# EAGLE board Incubadora_huevos (EAGLE 7.6.0)
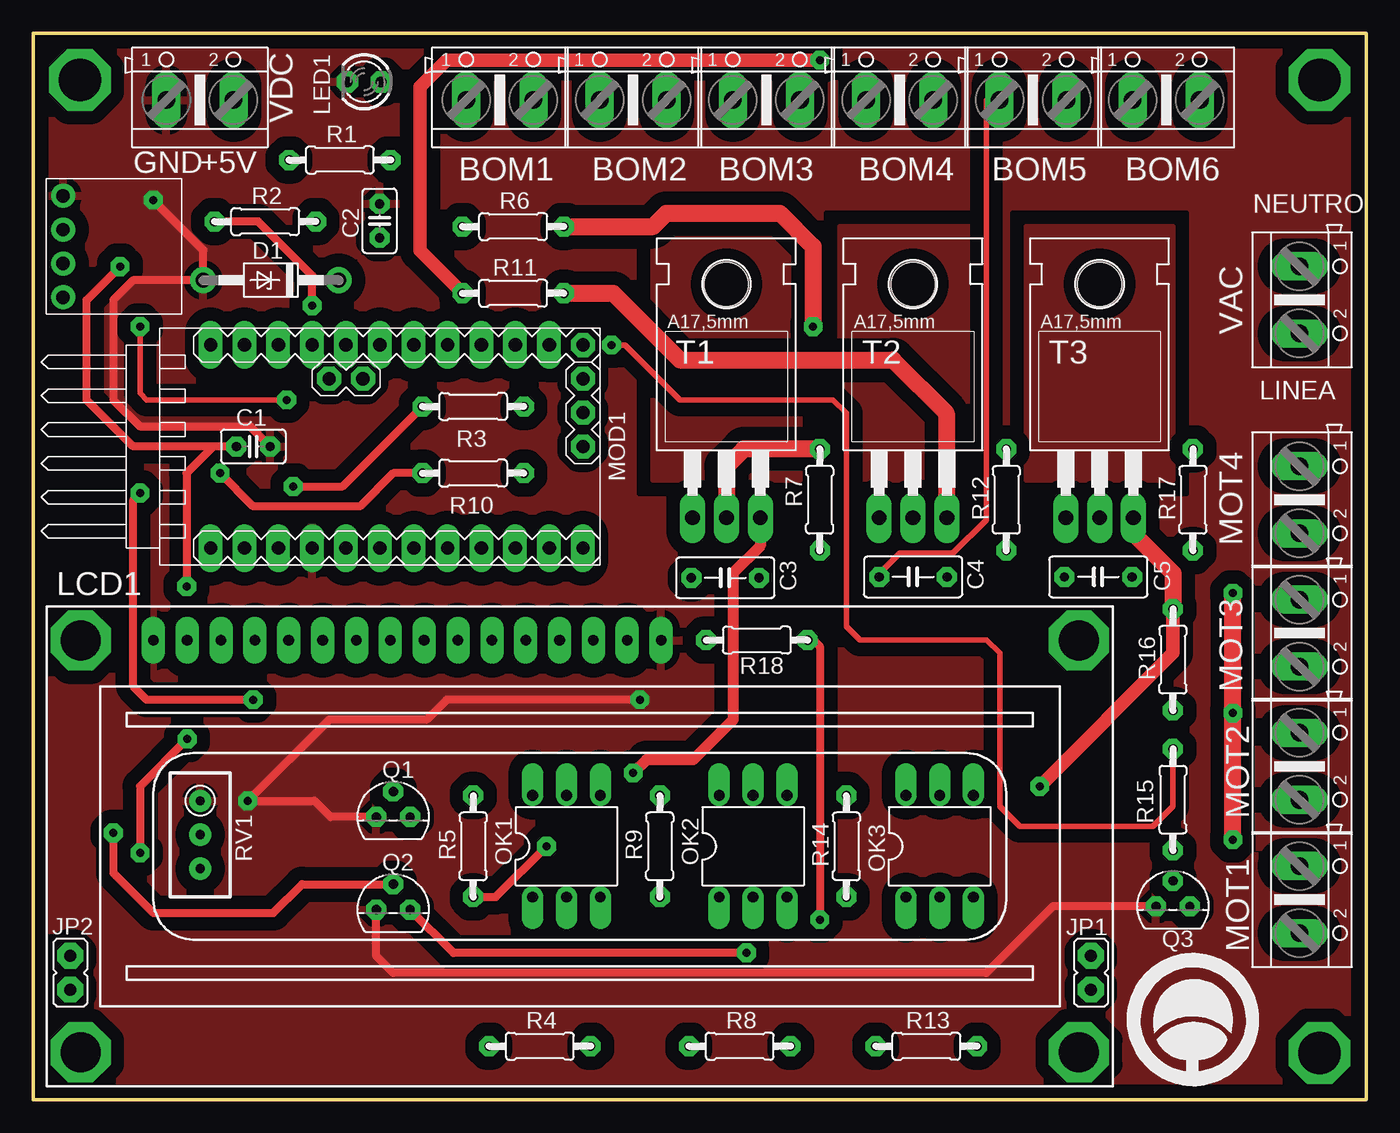
[diagram p0: board, top side]
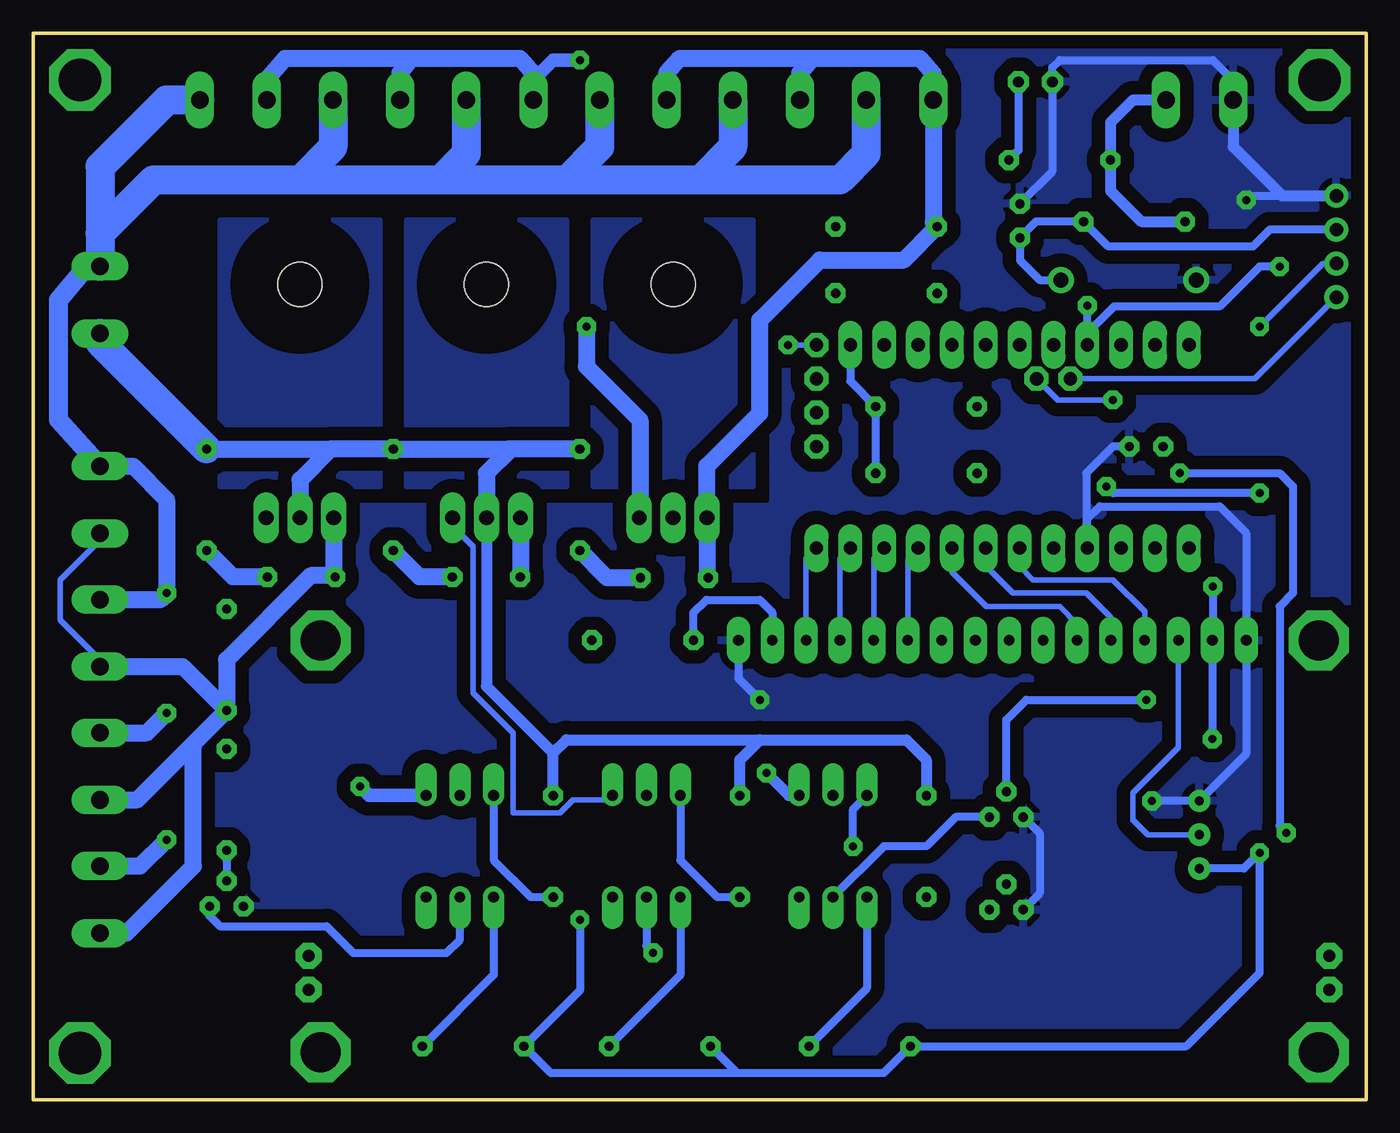
[diagram p1: board, bottom side, seen from below]

Size 100 x 80 mm. Coordinates in mm from the lower left corner, seen from the top.
Outline: 0,0 100,0 100,80 0,80 0,0
Copper layers (1*16): Top 0.035mm / dielectric 1.5mm / Bottom 0.035mm
Design rules "Circuitos_Creativos_2_capas": minimum track width 0.4mm, minimum drill 0.6mm, track to track 10mil, track to pad 10mil, pad to pad 10mil, via to via 10mil, smd to smd 8mil, copper to edge 1mm, drill to drill 15mil, minimum pad ring 0.4mm, minimum via ring 0.4mm, stop-mask expansion 4mil, vias tented up to drill 0mil, thermal gap 20mil
Net classes: 1 PWR: width 0.305 mm, clearance 0.254 mm

## Footprints (pad centres in the part's own frame; a part is rotated, then mirrored left to right if it is on the bottom)
AK500/2 = drill 1.321 long: 1 -2.515,0; 2 2.515,0
C025-025X050 = drill 0.7 pad 1.422 octagon: 1 -1.27,0; 2 1.27,0
C050-030X075 = drill 0.7 pad 1.422 octagon: 1 -2.54,0; 2 2.54,0
DO41Z10 = drill 1.1 pad 1.93: A 5.08,0; C -5.08,0
JP1 = drill 0.9 pad 1.93 octagon: 1 0,-1.27; 2 0,1.27
LCD1602 = drill 0.8 pad 1.778 long: 1 8,33.46; 2 10.54,33.46; 3 13.08,33.46; 4 15.62,33.46; 5 18.16,33.46; 6 20.7,33.46; 7 23.24,33.46; 8 25.78,33.46; 9 28.32,33.46; 10 30.86,33.46; 11 33.4,33.46; 12 35.94,33.46; 13 38.48,33.46; 14 41.02,33.46; 15 43.56,33.46; 16 46.1,33.46 | drill 3 octagon: P1 2.54,33.46; P2 2.54,2.54; P3 77.46,2.54; P4 77.46,33.46
LED3MM = drill 0.8 pad 1.6 octagon: A -1.27,0; K 1.27,0
ARDUINO-PRO-MINI#APC = drill 1 pad 1.676 octagon: J2.1 -1.27,5.08; J2.2 -3.81,5.08 | drill 1 pad 1.778 octagon: J3.1 15.24,0; J3.2 15.24,2.54; J3.3 15.24,5.08; J6.12 15.24,7.62 | drill 1 long: J6.1 -12.7,7.62; J6.2 -10.16,7.62; J6.3 -7.62,7.62; J6.4 -5.08,7.62; J6.5 -2.54,7.62; J6.6 0,7.62; J6.7 2.54,7.62; J6.8 5.08,7.62; J6.9 7.62,7.62; J6.10 10.16,7.62; J6.11 12.7,7.62; J7.1 15.24,-7.62; J7.2 12.7,-7.62; J7.3 10.16,-7.62; J7.4 7.62,-7.62; J7.5 5.08,-7.62; J7.6 2.54,-7.62; J7.7 0,-7.62; J7.8 -2.54,-7.62; J7.9 -5.08,-7.62; J7.10 -7.62,-7.62; J7.11 -10.16,-7.62; J7.12 -12.7,-7.62
DIL06 = drill 0.813 offset: 1 -2.54,-3.81; 2 0,-3.81; 3 2.54,-3.81; 4 2.54,3.81; 5 0,3.81; 6 -2.54,3.81
TO92D = drill 0.7 pad 1.422 octagon: B 0,1.905; C 1.27,0; E -1.27,0
0204/7 = drill 0.7 pad 1.422 octagon: 1 -3.81,0; 2 3.81,0
RTRIM3296W = drill 0.7 pad 1.676: 1 0,-2.54; 2 0,0; 3 0,2.54
TO220BH = drill 1.118 long: G 2.54,-6.35; T1 -2.54,-6.35; T2 0,-6.35 | hole 3.302: 0,11.176
SHT20 = drill 1 pad 1.778: GND -3.81,-1.27; SCL 3.81,-1.27; SDA 1.27,-1.27; VCC -1.27,-1.27

## Placement (x,y rotation side)
BOM1  [AK500/2]  35,75 0 top
BOM2  [AK500/2]  45,75 0 top
BOM3  [AK500/2]  55,75 0 top
BOM4  [AK500/2]  65,75 0 top
BOM5  [AK500/2]  75,75 0 top
BOM6  [AK500/2]  85,75 0 top
C1  100n  [C025-025X050]  16.5,49 0 top
C2  100n  [C025-025X050]  25.98,65.93 90 top
C3  10n  [C050-030X075]  51.91,39.14 180 top
C4  10n  [C050-030X075]  66.01,39.21 180 top
C5  10n  [C050-030X075]  79.9,39.21 180 top
D1  3.3V  [DO41Z10]  17.83,61.48 180 top
JP1  [JP1]  79.35,9.52 0 top
JP2  [JP1]  2.77,9.52 0 top
LCD1  HD44780LCD-1602  [LCD1602]  1,1 0 top
LED1  ROJO  [LED3MM]  24.82,76.36 180 top
MOD1  ARDUINO-PRO-MINI-3.3V#APC  [ARDUINO-PRO-MINI#APC]  26,49 0 top
MOT1  [AK500/2]  95,15 270 top
MOT2  [AK500/2]  95,25 270 top
MOT3  [AK500/2]  95,35 270 top
MOT4  [AK500/2]  95,45 270 top
OK1  MOC3021M  [DIL06]  40,19 0 top
OK2  MOC3021M  [DIL06]  54,19 0 top
OK3  MOC3021M  [DIL06]  68,19 0 top
Q1  2N3904  [TO92D]  27,21.2 0 top
Q2  2N3904  [TO92D]  27,14.25 0 top
Q3  2N3904  [TO92D]  85.5,14.5 0 top
R1  1k  [0204/7]  23,70.5 0 top
R2  100R  [0204/7]  17.4,65.87 0 top
R3  5k1  [0204/7]  33,52 180 top
R4  220R  [0204/7]  38,4 0 top
R5  330R  [0204/7]  33,19 90 top
R6  330R  [0204/7]  36,65.5 0 top
R7  39R  [0204/7]  59,45 90 top
R8  220R  [0204/7]  53,4 0 top
R9  330R  [0204/7]  47,19 90 top
R10  5k1  [0204/7]  33,47 180 top
R11  330R  [0204/7]  36,60.5 0 top
R12  39R  [0204/7]  73,45 90 top
R13  220R  [0204/7]  67,4 0 top
R14  330R  [0204/7]  61,19 90 top
R15  5k1  [0204/7]  85.5,22.5 270 top
R16  330R  [0204/7]  85.5,33 90 top
R17  39R  [0204/7]  87,45 90 top
R18  100R  [0204/7]  54.28,34.47 180 top
RV1  5k  [RTRIM3296W]  12.52,19.87 180 top
T1  BT138-H  [TO220BH]  52,50 0 top
T2  BT138-H  [TO220BH]  66,50 0 top
T3  BT138-H  [TO220BH]  80,50 0 top
U1  SHT20  [SHT20]  3.5,64 270 top
U$1  A4_HORIZONTAL  [LOGO]  87,6 0 top
VAC  [AK500/2]  95,60 270 top
VDC  [AK500/2]  12.5,75 0 top

## Library data of the parts
BOM1-BOM6 MOT1-MOT4 VAC VDC = con-ptr500; OC_FARNELL: unknown; OC_NEWARK: unknown
C1-C5 R1-R18 RV1 = rcl
D1 = diode
JP1 JP2 = jumper
LCD1 = adafruit
LED1 = led
MOD1 = DIY- comercial modules
OK1-OK3 = optocoupler; MF: FAIRCHILD SEMICONDUCTOR; MPN: MOC3021-M; OC_FARNELL: 1021365; OC_NEWARK: 95B7895
Q1-Q3 = transistor-small-signal
T1-T3 = triac
U1 = Circuitos-Creativos-Sensores
U$1 = Circuitos-Creativos-Estilos

## Nets
+3V3: C2.1 D1.C R2.2 U1.VCC
+5V: C1.1 LCD1.2 MOD1.J6.4 R1.1 R2.1 R4.1 R8.1 R13.1 R18.1 RV1.3 VDC.2
BOM: MOD1.J6.11 R3.1 R10.1
D4: LCD1.11 MOD1.J7.4
D5: LCD1.12 MOD1.J7.3
D6: LCD1.13 MOD1.J7.2
D7: LCD1.14 MOD1.J7.1
E: LCD1.6 MOD1.J7.5
GND: C1.2 C2.2 D1.A LCD1.1 LCD1.16 LED1.K MOD1.J7.9 Q1.E Q2.E Q3.E RV1.1 U1.GND VDC.1
GND.2: MOD1.J6.2
INT: MOD1.J7.8
LINEA: R5.2 R7.2 R9.2 R12.2 R14.2 R17.2 T1.T2 T2.T2 T3.T2 VAC.2
LOAD1: BOM1.1 BOM2.1 BOM3.1 C3.2 R6.1 T1.T1
LOAD2: BOM4.1 BOM5.1 BOM6.1 C4.2 R11.1 T2.T1
LOAD3: C5.2 MOT1.2 MOT2.2 MOT3.2 MOT4.2 R16.1 T3.T1
MOT: MOD1.J6.12 R15.1
N$1: LED1.A R1.2
N$2: OK1.4 R6.2 T1.G
N$3: OK1.1 R4.2
N$4: OK1.6 R5.1
N$5: Q1.B R3.2
N$6: OK1.2 Q1.C
N$7: OK2.4 R11.2 T2.G
N$8: OK2.1 R8.2
N$9: C3.1 R7.1
N$10: OK2.6 R9.1
N$11: Q2.B R10.2
N$12: OK2.2 Q2.C
N$13: C4.1 R12.1
N$14: OK3.4 R16.2 T3.G
N$15: OK3.1 R13.2
N$16: OK3.6 R14.1
N$17: Q3.B R15.2
N$18: OK3.2 Q3.C
N$19: C5.1 R17.1
N$34: LCD1.3 RV1.2
N$46: LCD1.15 R18.2
NEUTR: BOM1.2 BOM2.2 BOM3.2 BOM4.2 BOM5.2 BOM6.2 MOT1.1 MOT2.1 MOT3.1 MOT4.1 VAC.1
RAW: MOD1.J6.1
RS: LCD1.4 MOD1.J7.7
RW: LCD1.5 MOD1.J7.6
SCL: MOD1.J2.2 U1.SCL
SDA: MOD1.J2.1 U1.SDA

## Tracks (layer width: path | path; a pad name or v marks a point on that pad's centre or on a via)
+3V3
  Bottom 0.61: U1.VCC 7.23,65.27 8.5,64 19.34,64 R2.2 24.77,65.87 C2.1 25.98,62.98 24.5,61.5 22.93,61.5 D1.C
+5V  (via drill 0.6 pad 1.02, 0.6 pad 1.42)
  Top 0.61: v11.54,27.04 8,23.5 v8,18.5 | v11.5,38.5 11.5,47 13.5,49 C1.1 7.5,49 4,52.5 4,60 v6.5,62.5 | v20.92,59.58 20.92,61.82 16.87,65.87 R2.1 | R18.1 58.53,34.47 59,34 v59,13.5
  Bottom 0.61: v11.54,27.04 LCD1.2 11.5,34.5 v11.5,38.5 | RV1.3 9.17,17.33 v8,18.5 8,9.5 13.5,4 R4.1 36.19,2 47.19,2 | R8.1 47.19,2 | 47.19,2 61.19,2 R13.1 59,8.19 v59,13.5 | MOD1.J6.4 20.92,57.5 | 20.92,57.5 v20.92,59.58 | v6.5,62.5 8,62.5 11,59.5 18.92,59.5 20.92,57.5
  Bottom 0.813: VDC.2 17.5,75 19.19,73.31 R1.1 19.19,68.19 16.87,65.87 R2.1
BOM
  Bottom 0.61: MOD1.J6.11 38.7,53.89 R3.1 R10.1
D4
  Bottom 0.406: MOD1.J7.4 34.4,40.6 LCD1.11
D5
  Bottom 0.406: MOD1.J7.3 36.94,40.6 LCD1.12
D6
  Bottom 0.406: MOD1.J7.2 39.48,40.6 LCD1.13
D7
  Bottom 0.406: MOD1.J7.1 42.02,40.6 LCD1.14
E
  Bottom 0.406: MOD1.J7.5 31.08,39.58 28.5,37 23,37 21.7,35.7 LCD1.6
GND  (via drill 0.6 pad 1.42)
  Top 0.61: v9,67.5 12.75,63.75 D1.A 7.48,61.48 6,60 6,52.5 8,50.5 16.27,50.5 C1.2 | Q1.E 22.3,21.2 21.09,22.41 v16.09,22.41 22.18,28.5 29.5,28.5 31,30 v45.5,30 | Q3.E 76.5,14.5 71.5,9.5 27,9.5 25.73,10.77 Q2.E
  Bottom 0.61: MOD1.J7.9 20.92,43 | 20.92,43 20.92,43.58 20,44.5 11,44.5 9,42.5 LCD1.1 9,25.93 RV1.1 v16.09,22.41 | C1.2 19,49 21,47 21,43.08 20.92,43 | v9,67.5 8.69,67.81 U1.GND | 9.98,74.5 10,74.52 10,76.5 11.5,78 23,78 23.55,77.45 LED1.K 23.55,69.63 C2.2 | Q1.E 24.5,19.97 24.5,15.48 Q2.E | LCD1.16 47.1,31.6 v45.5,30
  Bottom 0.813: VDC.1 9.98,74.5 9.98,71.48 6.31,67.81 U1.GND
  pour Bottom (isolate 1.016, rank 2): -1,-1 101,-1 101,81 -1,81
  pour Top (isolate 1.016, rank 2): -2,-2 102,-2 102,82 -2,82
LINEA
  Top 1.27: R7.2 53.31,48.81 52,47.5 T1.T2
  Bottom 0.813: R9.2 47,25.5 45.5,27 | 45.5,27 34.5,27 33,25.5 R5.2 | R14.2 61,26 | 61,26 60,27 45.5,27 | T2.T2 66,31 61,26
  Bottom 1.27: R7.2 64.19,48.81 64.25,48.75 | 64.25,48.75 66,47 T2.T2 | 64.25,48.75 64.31,48.81 R12.2 77.69,48.81 | 77.69,48.81 80,46.5 T3.T2 | R17.2 77.69,48.81
  Bottom 2.184: VAC.2 95,56.81 R17.2
LOAD1
  Bottom 1.27: C3.2 49.46,39.23 T1.T1 49.46,47.54 45.5,51.5 45.5,58.5 41,63 34.69,63 R6.1 32.48,65.8 BOM1.1 32.5,75.02 32.5,77 33.5,78.12 41.5,78.12 | BOM2.1 42.48,77.02 41.5,78.12 | BOM3.1 52.48,77.02 51.5,78.12 41.5,78.12
LOAD2  (via drill 0.6 pad 1.02)
  Top 0.4: BOM5.1 71.5,75 71.5,43.5 69,41 65,41 63.5,39.5 C4.2
  Top 1.016: v59,78 31,78 29,76 29,63.69 R11.1
  Bottom 1.016: 62.5,75.02 62.5,76.5 61,78 v59,78
  Bottom 1.27: T2.T1 C4.2 | BOM5.1 72.48,77.02 71.62,78.12 | 71.62,78.12 63.5,78.12 62.5,77 62.5,75.02 BOM4.1 | BOM6.1 82.48,76.52 81.12,78.12 71.62,78.12
LOAD3
  Bottom 0.4: MOT4.2 95,42 98,39 98,36 95,33 MOT3.2
  Bottom 1.27: MOT2.2 92.2,22.48 88.09,26.59 | 88.09,26.59 R16.1 | T3.T1 77.46,39.31 | 77.46,39.31 C5.2 | MOT1.2 93.02,12.48 88,17.5 88,26.5 88.09,26.59 | MOT3.2 88.8,32.48 R16.1 | 77.46,39.31 79.19,39.31 85.5,33 R16.1
MOT  (via drill 0.6 pad 1.02)
  Top 0.406: v43.38,56.62 44.38,56.62 48.5,52.5 60,52.5 61,51.5 61,35.5 62,34.5 71.5,34.5 72.5,33.5 72.5,22 74,20.5 84,20.5 85.5,22 R15.1
  Bottom 0.406: MOD1.J6.12 v43.38,56.62
N$1
  Bottom 0.61: LED1.A 26.09,71.22 R1.2
N$2  (via drill 0.6 pad 1.02)
  Top 0.813: T1.G 54.54,41.54 52.5,39.5 52.5,28.5 49.5,25.5 46,25.5 v45,24.5
  Top 1.27: R6.2 46.5,65.5 47.5,66.5 56,66.5 58.5,64 v58.5,58
  Bottom 0.813: v45,24.5 43.31,22.81 OK1.4
  Bottom 1.27: v58.5,58 58.5,55 54.5,51 54.5,43.69 T1.G
N$3
  Bottom 0.61: OK1.1 37.46,8.35 R4.2
N$4  (via drill 0.6 pad 1.02)
  Top 0.61: R5.1 34.69,15.19 v38.5,19
  Bottom 0.61: v38.5,19 38.5,21.77 OK1.6
N$5  (via drill 0.6 pad 1.42)
  Top 0.61: v16.5,30 8.5,30 7.5,31 7.5,45 v8,45.5 | v19.5,46 23.19,46 R3.2
  Bottom 0.61: Q1.B 27,28.5 25.5,30 v16.5,30 | v8,45.5 19,45.5 v19.5,46
N$6
  Bottom 0.61: Q1.C 30.8,21.2 33,19 36.19,19 OK1.2
N$7
  Top 1.27: R11.2 43.5,60.5 48.5,55.5 64.5,55.5 68.5,51.5 68.5,43.69 T2.G
  Bottom 0.4: OK2.4 57,22.5 59.5,22.5 60.5,21.5 64,21.5 64,27.5 67,30.5 67,41.5 68.5,43 68.5,43.5 T2.G
N$8
  Bottom 0.61: OK2.1 51.46,9.35 R8.2
N$9
  Bottom 1.27: C3.1 56.95,39.14 R7.1
N$10
  Bottom 0.61: OK2.6 51.46,17.96 48.69,15.19 R9.1
N$11  (via drill 0.6 pad 1.42)
  Top 0.61: R10.2 27,47 24.5,44.5 16.5,44.5 v14,47 | v6,20 6,17 9,14 18,14 20.16,16.16 Q2.B
  Bottom 0.61: v14,47 6.5,47 5.5,46 5.5,38 6.5,37 6.5,20.5 v6,20
N$12  (via drill 0.6 pad 1.42)
  Top 0.61: v53.5,11 31.52,11 Q2.C
  Bottom 0.61: OK2.2 54,11.5 v53.5,11
N$13
  Bottom 1.27: C4.1 71.02,39.21 R12.1
N$14  (via drill 0.6 pad 1.02)
  Top 1.016: R16.2 85.5,33.5 v75.5,23.5
  Top 1.27: T3.G 82.54,42.46 85.5,39.5 R16.2
  Bottom 1.016: v75.5,23.5 74.81,22.81 OK3.4
N$15
  Bottom 0.61: OK3.1 65.46,9.35 R13.2
N$16
  Bottom 0.61: OK3.6 65.46,17.96 62.69,15.19 R14.1
N$17
  Bottom 0.61: R15.2 Q3.B
N$18
  Bottom 0.61: OK3.2 68,12 69,11 76,11 78,13 86,13 86.77,13.77 Q3.C
N$19
  Bottom 1.27: C5.1 85.02,39.21 R17.1
N$34
  Bottom 0.406: LCD1.3 14.08,26.42 17.5,23 17.5,21 16.37,19.87 RV1.2
N$46
  Bottom 0.61: R18.2 50.47,36.53 49.5,37.5 45.5,37.5 44.56,36.56 LCD1.15
NEUTR  (via drill 0.6 pad 1.02)
  Top 1.27: v90,19.5 v90,29 v90,38
  Bottom 1.27: MOT4.1 92.52,47.52 90,45 v90,38 90.5,37.5 94.98,37.5 MOT3.1 | MOT1.1 91.98,17.52 v90,19.5 | MOT2.1 91.48,27.52 v90,29
  Bottom 1.422: 95.98,62.52 98.12,60 98.12,51.02 MOT4.1
  Bottom 1.676: VAC.1 95.98,62.52
  Bottom 2.184: BOM6.2 90,75 95,70 95,65 | 95,65 VAC.1 | BOM1.2 37.52,70.98 39.5,69 50,69 | 50,69 60,69 | 60,69 69.5,69 | 69.5,69 80,69 | 80,69 91,69 95,65 | BOM5.2 77.52,71.48 80,69 | BOM4.2 67.52,70.98 69.5,69 | BOM3.2 57.52,71.48 60,69 | BOM2.2 47.52,71.48 50,69
RS
  Bottom 0.406: MOD1.J7.7 26,40 25,39 19,39 16.62,36.62 LCD1.4
RW
  Bottom 0.406: MOD1.J7.6 28.54,40.04 26.5,38 21,38 19.16,36.16 LCD1.5
SCL
  Bottom 0.406: MOD1.J2.2 8.34,54.08 U1.SCL
SDA  (via drill 0.6 pad 1.42)
  Top 0.406: v8,58 8,53 8.5,52.5 v19,52.5
  Bottom 0.406: U1.SDA 3.27,62.73 v8,58 | v19,52.5 23.15,52.5 MOD1.J2.1
T1
  pour Bottom (isolate 1.016): 58,46 46,46 46,65.5 46,66 58,66
  pour Top (isolate 1.016): 46.5,65.5 57.5,65.5 57.5,46.5 46.5,46.5
T2
  pour Bottom (isolate 1.016): 72,46 60,46 60,66 72,66
  pour Top (isolate 1.016): 60.5,65.5 71.5,65.5 71.5,46.5 60.5,46.5
T3
  pour Bottom (isolate 1.016): 74,46 86,46 86,66 74,66
  pour Top (isolate 1.016): 74.5,65.5 85.5,65.5 85.5,46.5 74.5,46.5
TOR1  (via drill 3.2 pad 3.81)
  other vias: 3.5,76.5
TOR2  (via drill 3.2 pad 3.81)
  other vias: 96.5,3.5
TOR3  (via drill 3.2 pad 3.81)
  other vias: 96.5,76.5

## Text on the board
tPlace: GND | +5V | NEUTRO | LINEA